# Altium PCB PCB1.PcbDoc
Units mil, origin at the board's own origin, x right, y up, seen from the top; angles counter-clockwise.
Board outline 3936.02 x 2558.06 mil, 2 copper layers (Top Layer, Bottom Layer), stack 61.855 mil thick; 53 components, 27 nets, 135 pads, 0 vias.
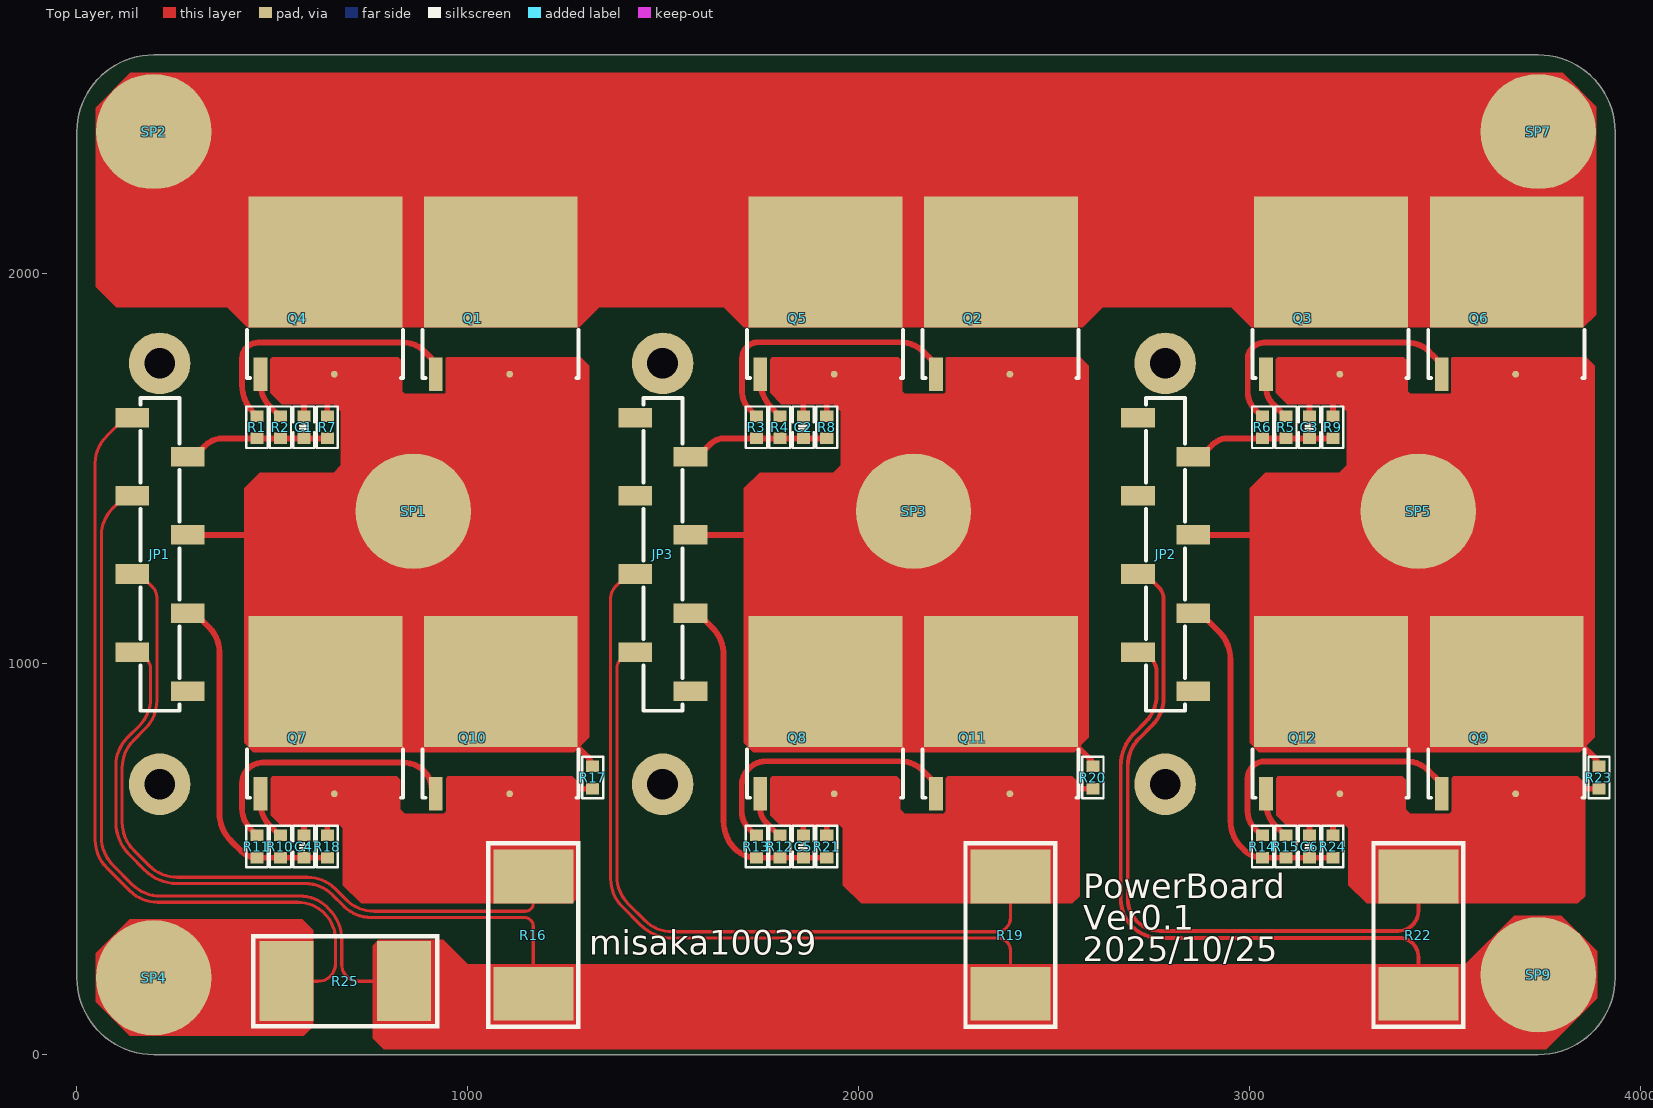
[diagram p0: Top Layer view]
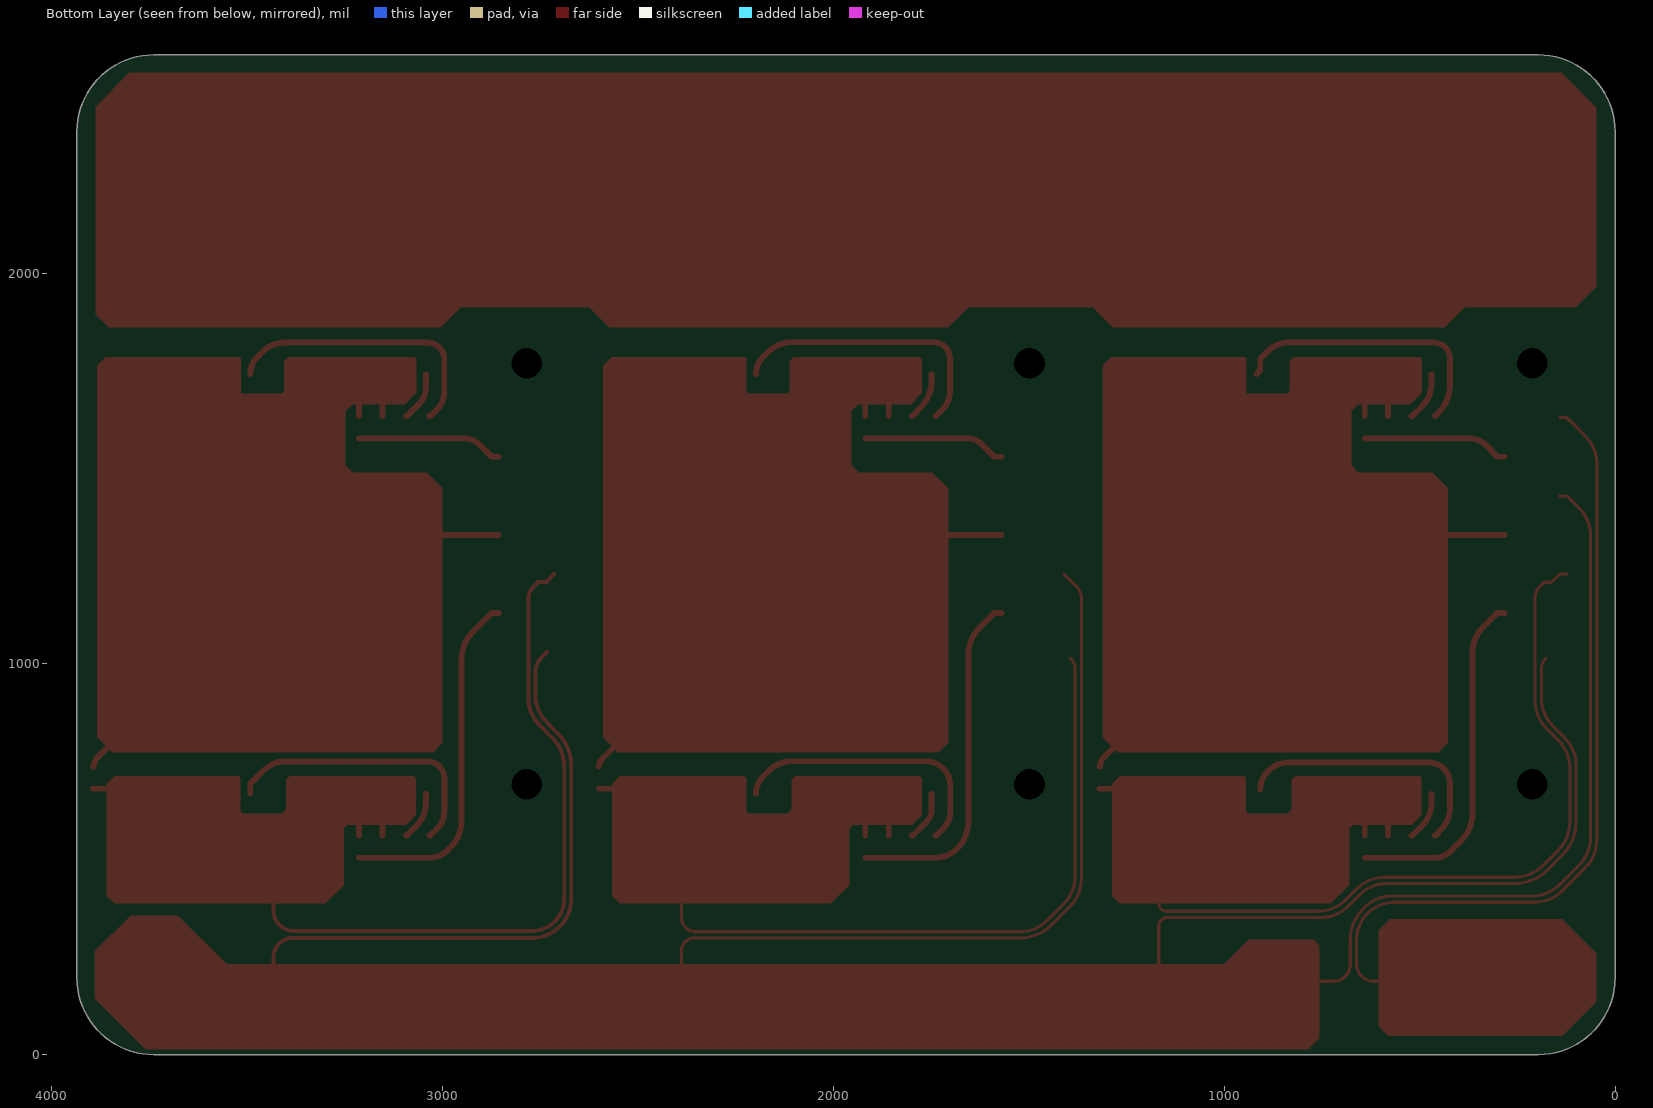
[diagram p1: Bottom Layer view, seen from below]
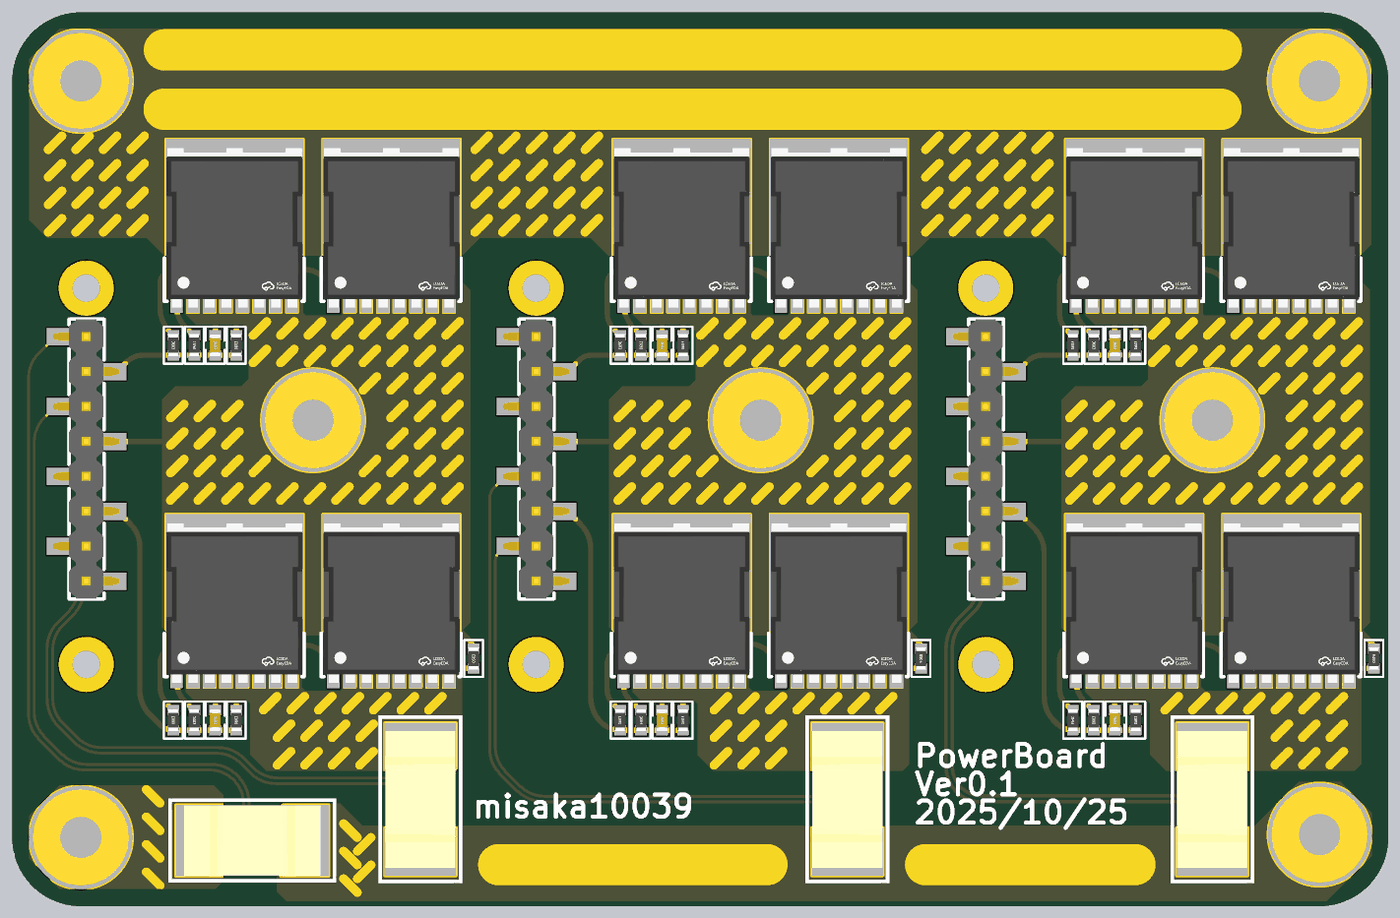
[diagram p2: 3D render of the assembled board from above, using the file's embedded part models]

## Layer stack, top to bottom
Top Solder: solder mask 0.4, Solder Resist, Dk 3.5
Top Layer: signal copper 1.4
Dielectric 1: dielectric 59.0551, FR-4, Dk 4.8
Bottom Layer: signal copper 1.4
Bottom Solder: solder mask 0.4, Solder Resist, Dk 3.5

## Board outline
0.25,196.6 0.25,2361.96 cw(c196.6,2361.96) 196.6,2558.31 3739.91,2558.31 cw(c3739.91,2361.96) 3936.27,2361.96 3936.27,196.6 cw(c3739.91,196.6) 3739.91,0.25 196.6,0.25 cw(c196.6,196.6)

## Design rules (kind name [scope] priority, off if disabled: settings)
Clearance [All] p1: gap=6 ignorepadtopadclearanceinfootprint=FALSE except(0: Arc-Text Track-Text SMDPad-Text THPad-Text Via-Text Fill-Text Poly-Text Region-Text Text-Text; 10: SMDPad-SMDPad SMDPad-THPad SMDPad-Via SMDPad-Hole THPad-THPad THPad-Via THPad-Hole Via-Via Via-Fill Via-Poly Via-Region Via-Hole Fill-Hole Poly-Hole Region-Hole Text-Hole)
PolygonConnect [All] p1: connectstyle=Direct reliefconductorwidth=10 reliefentries=4 polygonreliefangle="90 Angle" airgapwidth=10
RoutingVias [All] p1: holewidth=28 width=50 viastyle="Through Hole" minholewidth=28 minwidth=50 maxholewidth=28 maxwidth=50
SolderMaskExpansion [All] p1: expansion=4 istentingtop=FALSE
Width [All] p1: maxlimit=100 minlimit=8 preferedwidth=10
30 further rules are at their usual default settings.

## Components (designator, comment, footprint, x,y, rotation, side; value= is the part's Value field where it differs from the comment)
C1 "1nF 100V" C0603_l 581,1605.46 r270 top
C2 "1nF 100V" C0603_l 1859,1605.46 r270 top
C3 "1nF 100V" C0603_l 3154,1605.46 r270 top
C4 "1nF 100V" C0603_l 581,532.46 r270 top
C5 "1nF 100V" C0603_l 1859,532.46 r270 top
C6 "1nF 100V" C0603_l 3154,532.46 r270 top
JP1 "HDR-1X8" 贴片排针2.54mm_交错_8P 283.74,930 r90 top
JP2 "HDR-1X8" 贴片排针2.54mm_交错_8P 2856.74,930 r90 top
JP3 "HDR-1X8" 贴片排针2.54mm_交错_8P 1570.74,930 r90 top
Q1 "Nmos_TOLL8" TOLL-8 1013.15,1884.98 r0 top
Q2 "Nmos_TOLL8" TOLL-8 2293.15,1884.98 r0 top
Q3 "Nmos_TOLL8" TOLL-8 3137.51,1884.98 r0 top
Q4 "Nmos_TOLL8" TOLL-8 564.51,1884.98 r0 top
Q5 "Nmos_TOLL8" TOLL-8 1843.51,1884.98 r0 top
Q6 "Nmos_TOLL8" TOLL-8 3587.15,1884.98 r0 top
Q7 "Nmos_TOLL8" TOLL-8 564.51,811.3 r0 top
Q8 "Nmos_TOLL8" TOLL-8 1843.51,811.3 r0 top
Q9 "Nmos_TOLL8" TOLL-8 3587.15,811.3 r0 top
Q10 "Nmos_TOLL8" TOLL-8 1013.15,811.3 r0 top
Q11 "Nmos_TOLL8" TOLL-8 2293.15,811.3 r0 top
Q12 "Nmos_TOLL8" TOLL-8 3137.51,811.3 r0 top
R1 "4.7R 1%" r0603_l 461,1605.46 r270 top
R2 "4.7R 1%" r0603_l 521,1605.46 r90 top
R3 "4.7R 1%" r0603_l 1739,1605.46 r270 top
R4 "4.7R 1%" r0603_l 1799,1605.46 r90 top
R5 "4.7R 1%" r0603_l 3094,1605.46 r270 top
R6 "4.7R 1%" r0603_l 3034,1605.46 r90 top
R7 "10K 1%" r0603_l 641,1605.46 r90 top
R8 "10K 1%" r0603_l 1919,1605.46 r90 top
R9 "10K 1%" r0603_l 3214,1605.46 r90 top
R10 "4.7R 1%" r0603_l 521,532.46 r270 top
R11 "4.7R 1%" r0603_l 461,532.46 r90 top
R12 "4.7R 1%" r0603_l 1799,532.46 r270 top
R13 "4.7R 1%" r0603_l 1739,532.46 r90 top
R14 "4.7R 1%" r0603_l 3034,532.46 r270 top
R15 "4.7R 1%" r0603_l 3094,532.46 r90 top
R16 "0.003R" R3920 1168,306 r90 top
R17 "20K 1%" r0603_l 1320,709 r90 top
R18 "10K 1%" r0603_l 641,532.46 r90 top
R19 "0.003R" R3920 2389,306 r90 top
R20 "20K 1%" r0603_l 2600,709 r270 top
R21 "10K 1%" r0603_l 1919,532.46 r90 top
R22 "0.003R" R3920 3433,306 r90 top
R23 "20K 1%" r0603_l 3895,709 r90 top
R24 "10K 1%" r0603_l 3214,532.46 r90 top
R25 "0.003R" R3920 687,188 r0 top
SP1 "M3铜柱" 内嵌螺母M3*7*5 861,1391 r0 top
SP2 "M3铜柱" 内嵌螺母M3*7*5 196.6,2362.21 r0 top
SP3 "M3铜柱" 内嵌螺母M3*7*5 2141,1391 r0 top
SP4 "M3铜柱" 内嵌螺母M3*7*5 196.6,196.85 r0 top
SP5 "M3铜柱" 内嵌螺母M3*7*5 3433,1391 r0 top
SP7 "M3铜柱" 内嵌螺母M3*7*5 3739.91,2362.21 r0 top
SP9 "M3铜柱" 内嵌螺母M3*7*5 3740,205 r0 top

## Footprints (in the part's own frame and the unit in brackets; to place one, negate y for a bottom-side part, rotate by r counter-clockwise, add the part's x,y. Pads: shape width x height; smd on the part's side, far side on the other; paste and mask are expansions set on the pad)
C0603_l [mm] "贴片MLCC电容"
  rect 0.75x0.85 smd: 1(-0.725,0) 2(0.725,0)
  silkscreen extent -1.35,-0.69 1.35,0.69, body extent -0.8,-0.4 0.8,0.4, height 0.8
r0603_l [mm] "1/10W贴片电阻"
  rect 0.75x0.85 smd: 1(-0.725,0) 2(0.725,0)
  silkscreen extent -1.35,-0.69 1.35,0.69, body extent -0.8,-0.4 0.8,0.4, height 0.4
R3920 [mm]
  rect 3.5x5.2 smd: 1(-3.81,0) 2(3.81,0)
  silkscreen extent -6.1,-3.05 6.1,3.05, body extent -4.96,-2.55 4.96,2.55, height 1.28
TOLL-8 [mm]
  rect 0.9x2.2 smd paste-100: 1(-2.4,-3.65)
  round 0.44 smd: 2(2.4,-3.65)
  rect 10x8.5 smd paste-100: 3(1.825,3.65)
  Top Layer region: -1.65,-2.55 -1.65,-4.75 -0.75,-4.75 -0.75,-3.615 -0.45,-3.615 -0.45,-4.75 0.45,-4.75 0.45,-3.615 0.75,-3.615 0.75,-4.75 1.65,-4.75 1.65,-3.615 1.95,-3.615 1.95,-4.75 2.85,-4.75 2.85,-3.615 3.15,-3.615 3.15,-4.75 4.05,-4.75 4.05,-3.615 4.35,-3.615 4.35,-4.75 5.25,-4.75 5.25,-3.615 5.55,-3.615 5.55,-4.75 6.45,-4.75 6.45,-3.615 6.45,-3.615 6.45,-2.551 6.45,-2.551 6.45,-2.55 5.55,-2.55 5.55,-2.551 5.25,-2.551 5.25,-2.55 4.35,-2.55 4.35,-2.551 4.05,-2.551 4.05,-2.55 3.15,-2.55 3.15,-2.551 2.85,-2.551 2.85,-2.55 1.95,-2.55 1.95,-2.551 1.65,-2.551 1.65,-2.55 0.75,-2.55 0.75,-2.551 0.45,-2.551 0.45,-2.55 -0.45,-2.55 -0.45,-2.551 -0.75,-2.551 -0.75,-2.55 -1.65,-2.55 -1.65,-2.55
  silkscreen extent -3.28,-3.91 6.86,-0.76, body extent -3.12,-4.36 6.78,7.22, height 2.32
内嵌螺母M3*7*5 [mm]
  round 7.5 smd: 1(0,0)
  body extent -3.49,-3.5 3.49,3.5, height 5
贴片排针2.54mm_交错_8P [mm] "交错贴片排针"
  rect 1.27x2.2 smd: 1(0,0) 2(2.54,3.6) 3(5.08,0) 4(7.62,3.6) 5(10.16,0) 6(12.7,3.6) 7(15.24,0) 8(17.78,3.6)
  silkscreen extent -1.27,0.53 19.05,3.07, body extent -1.27,-0.57 19.06,4.23, height 6.59

## Part data
C1 C2 C3 C4 C5 C6: library part C, "无极性贴片电容", BOM名称=无极性贴片电容, 学习资源=www.ooocke.com, 材质=X7R, 版权归属=源创客
JP1 JP2 JP3: library part "Header 8", "8P接插件", BOM名称=8P接插件, 学习资源=www.ooocke.com, 版权归属=源创客
R1 R2 R3 R4 R5 R6 R7 R8 R9 R10 R11 R12 R13 R14 R15 R16 R17 R18 R19 R20 R21 R22 R23 R24 R25: library part R, "贴片电阻", BOM名称=贴片电阻, 学习资源=www.ooocke.com, 版权归属=源创客
SP1 SP2 SP3 SP4 SP5 SP7 SP9: library part 铜柱大焊盘, "铜柱", BOM名称=铜柱, 学习资源=www.ooocke.com, 版权归属=源创客

## Free pads (board coordinates)
  round 157.48 / inner round 157.48 / far side round 0 hole 78.74: Hole(212,692) Hole(212,1769) Hole(1499,692) Hole(1499,1769) Hole(2785,692) Hole(2785,1769)

## Nets (pads, with @x,y where several pads share a name; then routed paths per layer and width w, separated by ;. In a path a pad name is that pad's centre, name@x,y a point inside that pad or via, vN(x,y) a via of type N, cw(c..) or ccw(c..) an arc to the next point about the centre after c; other vN are vias at no path point)
HO-U: C1.2 JP1.7 R1.2 R2.1 R7.1 | length 375.1
  Top Layer w15: JP1.7 302.05,1530 319.55,1547.5 319.55,1549.53 328.01,1557.99 ; 328.03,1558.01 cw(c373.7,1512.3) 373.7,1576.91 R1.2 R7.1
HO-V: C2.2 JP3.7 R3.2 R4.1 R8.1 | length 365.6
  Top Layer w15: JP3.7 1589.05,1530 1622.02,1562.98 ; 1622.05,1563 cw(c1655.67,1529.33) 1655.67,1576.91 R3.2 R4.1 C2.2 R8.1
HO-W: C3.2 JP2.7 R5.2 R6.1 R9.1 | length 374.4
  Top Layer w15: JP2.7 2875.05,1530 2906.02,1560.98 cw(c2944.5,1522.5) 2944.5,1576.91 R6.1 R5.2 C3.2 R9.1
LO-U: C4.2 JP1.3 R10.2 R11.1 R18.1 | length 893.2
  Top Layer w15: JP1.3 302.05,1130 339.02,1093.02 ; 339.05,1093 cw(c276.31,1030.31) 365,1030.31 365,618.42 ccw(c465,618.42) 394.29,547.71 421.88,520.12 ccw(c461,559.23) 437.58,509.11 ccw(c461,559.23) R11.1 R10.2 C4.2 R18.1
LO-V: C5.2 JP3.3 R12.2 R13.1 R21.1 | length 893.3
  Top Layer w15: JP3.3 1589.05,1130 1625.71,1093.34 cw(c1555,1022.63) 1655,1022.63 1655,597.42 ccw(c1755,597.42) 1684.29,526.71 1684.52,526.48 ; 1684.55,526.45 ccw(c1739,580.96) R13.1 R12.2 C5.2 R21.1
LO-W: C6.2 JP2.3 R14.2 R15.1 R24.1 | length 894.9
  Top Layer w15: JP2.3 2875.05,1130 2922.71,1082.34 cw(c2852,1011.63) 2952,1011.63 2952,597.89 ccw(c3045.89,597.89) 2979.5,531.5 2988.06,522.94 ccw(c3034,568.89) 3013.86,507.11 ccw(c3034,568.89) R14.2 R15.1 C6.2 R24.1
NetQ1_1: Q1.1 R1.1 | length 725.1
  Top Layer w15: 434.83,1810.11 ccw(c463.51,1781.48) 422.98,1781.48 422.98,1713.44 ccw(c522.98,1713.44) 451.77,1643.24 ccw(c522.98,1713.44) 452.27,1642.73 R1.1 ; 434.87,1810.15 cw(c463.51,1781.48) 463.51,1822 837.7,1822 cw(c837.7,1751.25) 887.71,1801.29 908.44,1780.56 908.44,1751.49 Q1.1
NetQ2_1: Q2.1 R3.1 | length 722.6
  Top Layer w15: R3.1 1720.67,1652.33 cw(c1764.92,1696.57) 1702.35,1696.57 1702.35,1781.81 cw(c1743.56,1781.81) 1714.42,1810.95 cw(c1743.56,1781.81) 1743.56,1823.02 2106.8,1823.02 cw(c2106.8,1736.8) 2167.76,1797.76 2180.56,1784.96 cw(c2136.88,1741.28) Q2.1
NetQ3_1: Q3.1 R5.1 | length 127
  Top Layer w15: Q3.1 3043.02,1707.75 ccw(c3102.75,1707.75) 3043.02,1707.06 ccw(c3102.75,1707.75) 3060.52,1665.52 3092.03,1634 R5.1
NetQ4_1: Q4.1 R2.2 | length 125.9
  Top Layer w15: Q4.1 470.02,1717.67 ccw(c553.69,1717.67) 494.49,1658.54 ; 494.53,1658.51 519.03,1634 R2.2
NetQ5_1: Q5.1 R4.2 | length 123.7
  Top Layer w15: Q5.1 1749.02,1725.4 ccw(c1849.02,1725.4) 1778.31,1654.69 R4.2
NetQ6_1: Q6.1 R6.2 | length 722.9
  Top Layer w15: R6.2 3032.03,1634 3014.13,1651.9 cw(c3057.34,1695.1) 2996.24,1695.1 2996.24,1779.73 cw(c3038.51,1779.73) 3008.62,1809.62 cw(c3038.51,1779.73) 3038.51,1822 3405.77,1822 cw(c3405.77,1745.32) 3459.97,1799.56 ; 3459.99,1799.54 3474.56,1784.96 ; 3474.58,1784.95 cw(c3430.88,1741.28) Q6.1
NetQ7_1: Q7.1 R10.1 | length 125.3
  Top Layer w15: Q7.1 470.02,644.67 ccw(c553.69,644.67) 494.49,585.54 ; 494.53,585.51 519.03,561 R10.1
NetQ8_1: Q8.1 R12.1 | length 126.4
  Top Layer w15: Q8.1 1749.02,628.8 ccw(c1796.8,628.8) 1763.02,595.02 1797.03,561 R12.1
NetQ9_1: Q9.1 R14.1 | length 727.6
  Top Layer w15: 3008.74,737.74 ccw(c3039.64,706.88) 2995.97,706.88 2995.97,622.57 ccw(c3057.53,622.57) 3014,579.03 3032.03,561 R14.1 ; 3008.78,737.78 cw(c3039.64,706.88) 3039.64,750.55 3401.97,750.55 cw(c3401.97,670.07) 3458.87,726.98 3482.44,703.41 3492.66,693.19 Q9.1
NetQ10_1: Q10.1 R11.2 | length 702
  Top Layer w15: 438.44,731.92 ccw(c475.6,694.8) 423.08,694.8 423.08,629.22 ccw(c496.22,629.22) 444.5,577.5 451.77,570.23 451.77,568.26 459.03,561 R11.2 ; 438.48,731.96 cw(c475.6,694.8) 475.6,747.33 837.14,747.33 cw(c837.14,676.02) 887.53,726.47 888.83,725.17 cw(c841.47,677.82) Q10.1@908.44,677.82
NetQ11_1: Q11.1 R13.2 | length 717.6
  Top Layer w15: 1719.93,732.64 ccw(c1764.21,688.41) 1701.62,688.41 1701.62,621.45 ccw(c1762.07,621.45) 1719.33,578.71 1737.03,561 R13.2 ; 1719.98,732.69 cw(c1764.21,688.41) 1764.21,751 2107.2,751 cw(c2107.2,669.75) 2164.61,727.24 ; 2164.65,727.2 2180.56,711.29 ; 2180.58,711.27 cw(c2136.88,667.6) Q11.1
NetQ12_1: Q12.1 R15.2 | length 125.3
  Top Layer w15: Q12.1 3043.02,644.67 ccw(c3126.69,644.67) 3067.49,585.54 ; 3067.53,585.51 3092.03,561 R15.2
Shunt_BusH: JP1.2 JP1.6 JP2.2 JP3.4 R16.1 R19.1 R22.1 R25.2 SP9.1 | length 7368.5
  Top Layer w8: JP1.6 123.69,1430 92.29,1398.6 ccw(c163,1327.89) 63,1327.89 63,556.05 ccw(c163,556.05) 92.29,485.34 142.34,435.29 ccw(c213.05,506) 213.05,406 570.55,406 cw(c570.55,306) 641.26,376.71 645.02,372.94 cw(c565.28,293.28) 678,293.28 678,230.68 ccw(c720.68,230.68) 690.5,200.5 ccw(c720.68,230.68) 720.68,188 R25.2 ; JP1.2@177,1014 178.21,1012.79 cw(c152.42,987) 182.08,1008.23 cw(c152.42,987) 188.89,987 188.89,911.94 cw(c88.89,911.94) 159.6,841.23 129.29,810.92 ccw(c200,740.21) 100,740.21 100,594.3 ccw(c216,594.3) 134,512.25 174.25,472 cw(c168.59,466.34) 174.31,471.93 cw(c168.69,466.25) 174.39,471.85 ccw(c256.3,554) 256.3,438 584.48,438 cw(c584.48,339.63) 654.01,409.21 ; 654.03,409.19 682.85,380.38 ccw(c753.56,451.09) 753.56,351.09 1145.51,351.09 cw(c1145.51,328.6) 1161.41,344.5 cw(c1145.51,328.6) 1168,328.6 R16.1 ; JP3.4@1410.69,1230 1389.69,1209 1377.85,1197.15 ccw(c1406.45,1168.55) 1366,1168.55 1366,449.79 ccw(c1466,449.79) 1395.29,379.08 1441.9,332.47 ; 1441.93,332.45 cw(c1436.25,326.81) 1441.97,332.4 cw(c1436.34,326.72) 1442.05,332.32 ccw(c1523.95,414.47) 1523.95,298.47 2356.89,298.47 cw(c2356.89,266.36) 2379.57,289.09 ; 2379.62,289.04 cw(c2356.89,266.36) 2389,266.36 R19.1
  Top Layer w10: JP2.2@2733.31,1030 JP2.2@2748.15,1015.15 ; JP2.2@2748.18,1015.13 cw(c2712.31,979.31) 2763,979.31 2763,920.88 cw(c2663,920.88) 2733.71,850.17 2705.9,822.36 ccw(c2789.29,738.87) 2705.86,822.32 ccw(c2789.29,738.87) 2671.29,738.87 2671.29,398.67 ccw(c2771.29,398.67) 2700.58,327.96 2700.8,327.75 ccw(c2771.29,398.67) 2771.29,298.67 3383.82,298.67 cw(c3383.82,249.5) 3418.56,284.3 ; 3418.63,284.24 cw(c3383.82,249.5) 3433,249.5 R22.1
Shunt_BusL: JP1.8 R25.1 SP4.1 | length 2089.7
  Top Layer w8: JP1.8 123.69,1630 102.69,1609 102.69,1608.69 74.85,1580.85 ccw(c142.07,1513.62) 47,1513.62 47,549.42 ccw(c147,549.42) 76.29,478.71 135.71,419.29 ccw(c206.42,490) 206.42,390 565.26,390 cw(c565.26,293.23) 633.67,361.67 ; R25.1 617.62,188 ccw(c617.62,232.38) 649,201 ccw(c617.62,232.38) 662,232.38 662,293.28 ccw(c565.28,293.28) 633.68,361.66
Shunt_UH: C4.1 JP1.4 Q7.2 Q10.2 R16.2 R17.1 R18.2 | length 2123
  Top Layer w8: JP1.4@123.69,1230 JP1.4 163,1209 182,1209 193.45,1197.55 cw(c165.81,1169.92) 204.89,1169.92 204.89,905.31 cw(c104.89,905.31) 175.6,834.6 145.29,804.29 ccw(c216,733.58) 116,733.58 116,594.3 ccw(c216,594.3) 145.29,523.58 185.58,483.29 ccw(c256.3,554) 256.3,454 590.43,454 cw(c590.43,354) 661.14,424.71 689.47,396.38 ccw(c760.18,467.09) 760.18,367.09 1147.74,367.09 ccw(c1147.74,387.34) 1162.06,373.01 ccw(c1147.74,387.34) 1168,387.34 R16.2
  Top Layer w15: C4.1 581,595 ; R18.2 641,594 ; 1219.84,668.98 1231.32,680.46 R17.1
Shunt_VH: C5.1 JP3.2 Q8.2 Q11.2 R19.2 R20.2 R21.2 | length 1976.5
  Top Layer w8: JP3.2@1395,1015 1391.9,1011.9 ccw(c1415.8,988) 1388.19,1007.5 ccw(c1415.8,988) 1382,988 1382,456.42 ccw(c1482,456.42) 1411.29,385.71 1453.24,343.76 ccw(c1523.95,414.47) 1523.95,314.47 2353.93,314.47 ccw(c2353.93,349.54) 2378.7,324.71 ; 1859,612 1860,613 ; 2378.75,324.77 ccw(c2353.93,349.54) 2389,349.54 R19.2
  Top Layer w15: C5.1 1859,612 ; R21.2 1919,603 ; 2491,674 2497.46,680.46 R20.2
Shunt_WH: C6.1 JP2.4 Q9.2 Q12.2 R22.2 R23.1 R24.2 | length 1976.9
  Top Layer w10: JP2.4 2735,1210 2755,1210 2768,1197 cw(c2736.62,1165.62) 2781,1165.62 2781,913.42 cw(c2681,913.42) 2751.71,842.71 2718.58,809.58 ccw(c2789.29,738.87) 2689.29,738.87 2689.29,398.67 ccw(c2771.29,398.67) 2713.31,340.69 ccw(c2771.29,398.67) 2771.29,316.67 3381.23,316.67 ccw(c3381.23,368.44) 3417.84,331.84 ccw(c3381.23,368.44) 3433,368.44 R22.2
  Top Layer w15: C6.1 3154,599 ; R24.2 3214,597 ; 3799,684 3802.54,680.46 R23.1
VBUS: Q1.3 Q2.3 Q3.3 Q4.3 Q5.3 Q6.3 SP2.1 SP7.1
VS_U: C1.1 JP1.5 Q1.2 Q4.2 Q7.3 Q10.3 R7.2 R17.2 SP1.1 | length 558.1
  Top Layer w15: JP1.5 436,1330 ; C1.1 581,1671 ; R7.2 641,1671 ; Q10.3 1114.53,955 1274.35,795.18 1308.17,761.36 cw(c1284.35,737.54) 1310.77,758.44 cw(c1284.35,737.54) 1318.03,737.54 R17.2
VS_V: C2.1 JP3.5 Q2.2 Q5.2 Q8.3 Q11.3 R8.2 R20.1 SP3.1 | length 569.1
  Top Layer w15: JP3.5 1720,1330 ; C2.1 1859,1680 ; R8.2 1919,1677 ; Q11.3 2394.53,955 2554.35,795.18 2591.53,758 cw(c2571.07,737.54) R20.1
VS_W: C3.1 JP2.5 Q3.2 Q6.2 Q9.3 Q12.3 R9.2 R23.2 SP5.1 | length 585.6
  Top Layer w15: JP2.5 3019,1330 ; C3.1 3154,1681 ; R9.2 3214,1678 ; Q9.3 3688.53,955 3848.35,795.18 3883.87,759.65 cw(c3861.76,737.54) 3885.77,757.58 cw(c3861.76,737.54) 3893.03,737.54 R23.2
pads on no net: JP1.1 JP2.1 JP2.6 JP2.8 JP3.1 JP3.6 JP3.8

## Other copper
Top Layer:
  region net VS_V: 1779,1785 1774,1780 1774,1694 1803,1665 1937,1665 1955,1647 1955,1508 1936,1489 1747,1489 1707,1449 1707,798 1731,774 2552,774 2590,812 2590,1763 2568,1785 2226,1785 2223,1782 2223,1695 2219,1691 2175,1691 2118,1691 2112,1697 2112,1775 2102,1785
  region net Shunt_VH: 1779,712 1775,708 1775,613 1799,589 1951,589 1960,580 1960,434 2007,387 2547,387 2566,406 2566,693 2547,712 2228,712 2224,708 2224,623 2218,617 2118,617 2107,628 2107,703 2098,712
  region net VBUS: 137,2512 48,2423 48,1965 101,1912 385,1912 436,1861 1286,1861 1337,1912 1656,1912 1707,1861 2574,1861 2625,1912 2954,1912 3005,1861 3855,1861 3888,1894 3888,2426 3802,2512
  region net Shunt_BusL: 136,346 49,259 49,135 135,49 581,49 605,73 605,318 577,346
  region net Shunt_BusH: 3799,356 3890,265 3890,144 3760,14 3512,14 3310,14 785,14 757,42 757,279 772,294 938,294 976,256 1001,231 3553,231 3678,356
  region net Shunt_WH: 3073,712 3069,708 3069,613 3093,589 3245,589 3254,580 3254,434 3301,387 3841,387 3860,406 3860,693 3841,712 3522,712 3518,708 3518,623 3512,617 3412,617 3401,628 3401,703 3392,712
  region net Shunt_UH: 500,712 496,708 496,613 520,589 672,589 681,580 681,434 728,387 1268,387 1287,406 1287,693 1268,712 949,712 945,708 945,623 939,617 839,617 828,628 828,703 819,712
  region net VS_W: 3073,1785 3068,1780 3068,1694 3097,1665 3231,1665 3249,1647 3249,1508 3230,1489 3041,1489 3001,1449 3001,798 3025,774 3846,774 3884,812 3884,1763 3862,1785 3520,1785 3517,1782 3517,1694 3514,1691 3469,1691 3412,1691 3406,1697 3406,1775 3396,1785
  region net VS_U: 500,1785 495,1780 495,1694 524,1665 658,1665 676,1647 676,1508 657,1489 468,1489 428,1449 428,798 452,774 1273,774 1311,812 1311,1763 1289,1785 947,1785 944,1782 944,1693.78 941.22,1691 896,1691 839,1691 833,1697 833,1775 823,1785

## Silkscreen, mask and mechanical layers (free items; w line width, h text height)
Top Overlay:
  text "PowerBoard" at 2574.81,400.81 h62.99
  text "Ver0.1" at 2574.81,319.81 h62.99
  text "misaka10039" at 1310.81,255.81 h62.99
  text "2025/10/25" at 2573.81,238.81 h62.99
Top Solder:
  drawing of 263 lines, arcs and shapes, not listed
Mechanical 1:
  the board outline again, w0.5